# EAGLE board 7seg (EAGLE 6.4)
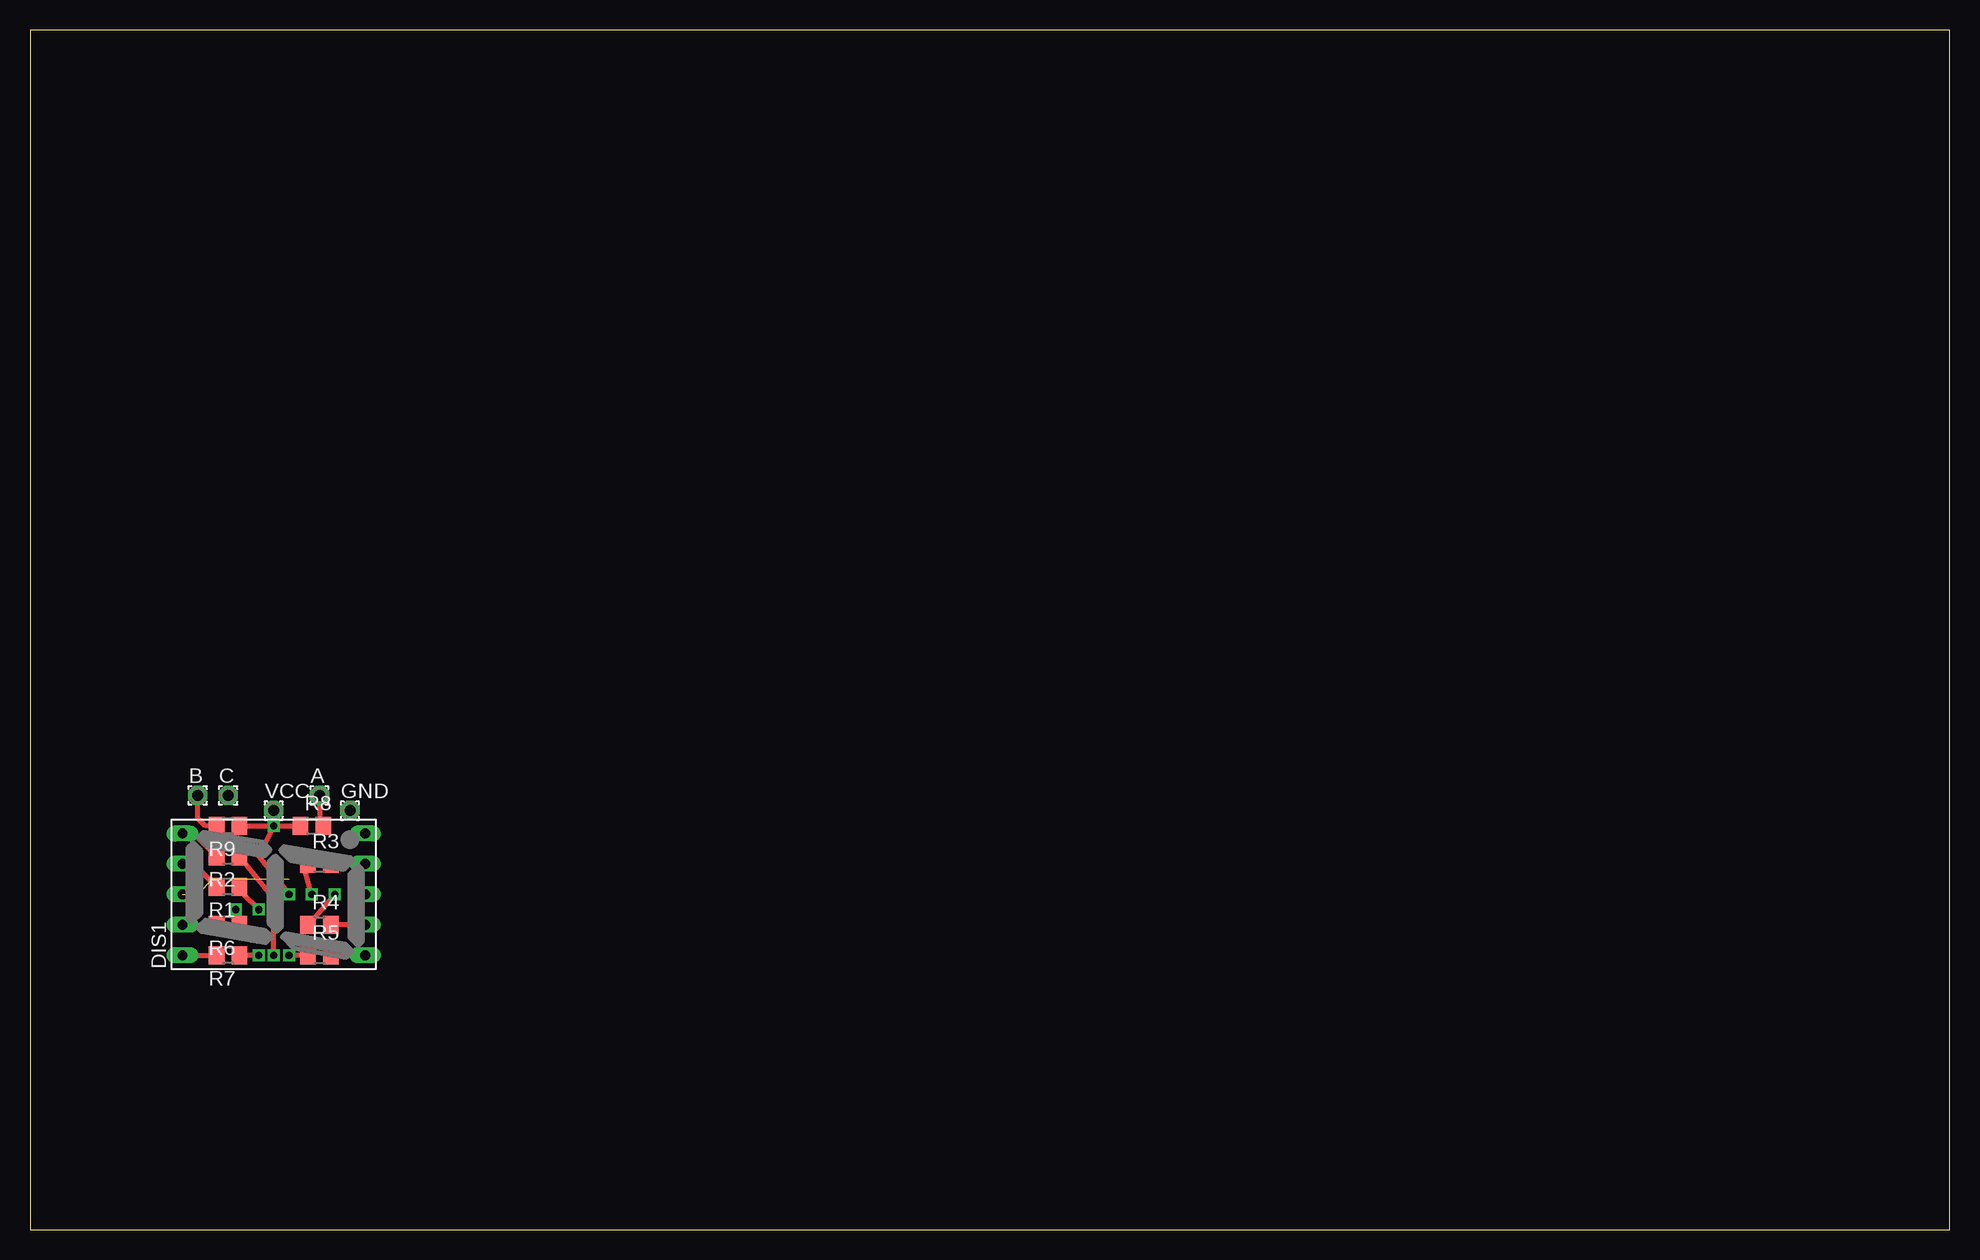
[diagram p0: board, top side]
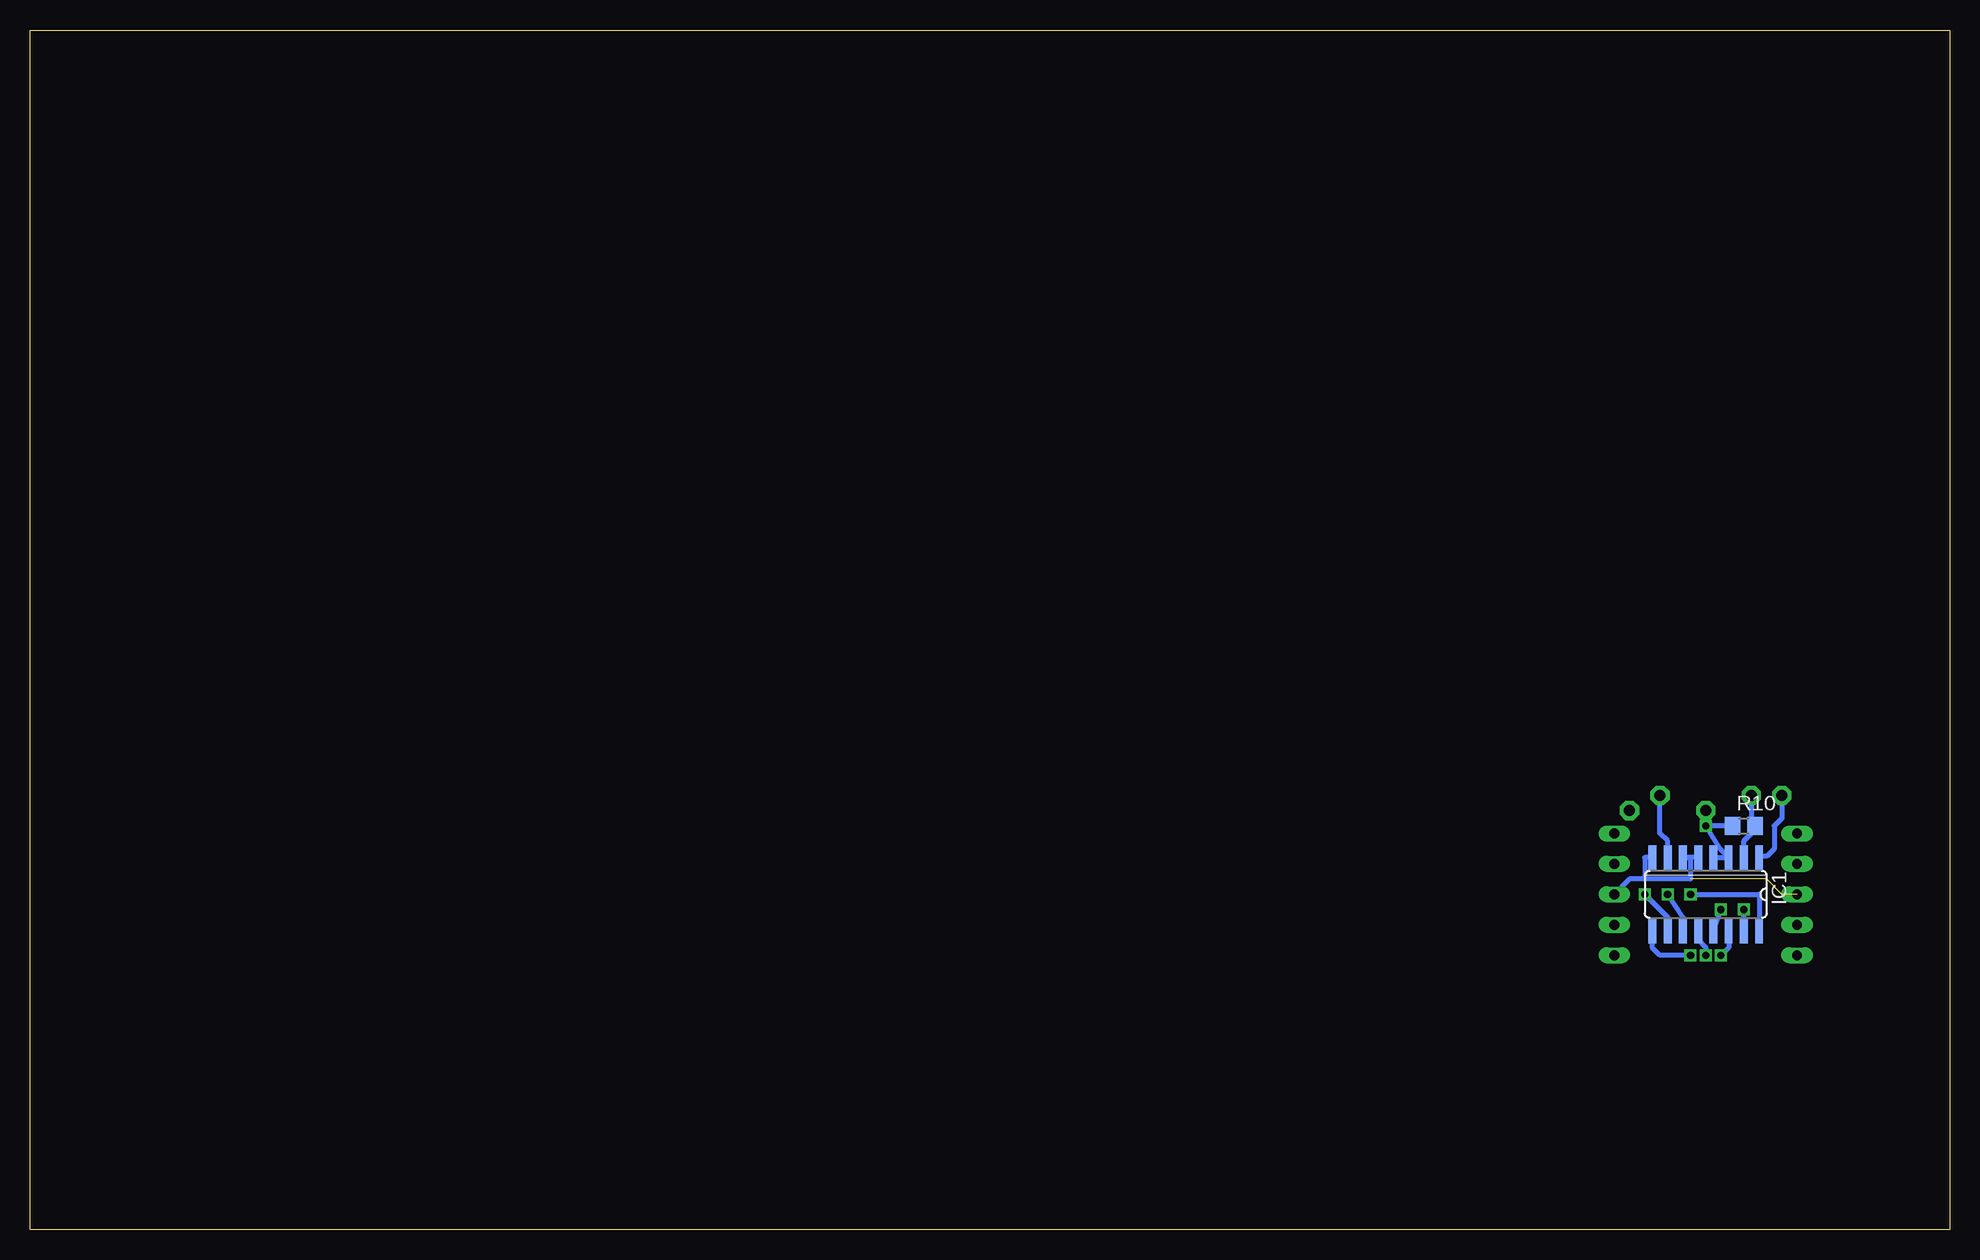
[diagram p1: board, bottom side, seen from below]

Size 160 x 100 mm. Coordinates in mm from the lower left corner, seen from the top.
Outline: 0,0 160,0 160,100 0,100 0,0
Copper layers (1*16): Top 0.035mm / dielectric 1.5mm / Bottom 0.035mm
Design rules "default": minimum track width 10mil, minimum drill 24mil, track to track 8mil, track to pad 8mil, pad to pad 8mil, via to via 8mil, smd to smd 8mil, copper to edge 40mil, drill to drill 8mil, minimum pad ring 10mil, minimum via ring 8mil, stop-mask expansion 4mil, vias tented up to drill 0mil, thermal gap 10mil

## Footprints (pad centres in the part's own frame; a part is rotated, then mirrored left to right if it is on the bottom)
1,6/0,9 = drill 0.914 pad 1.6 octagon: 1 0,0
HDSP-M = drill 0.813 long: 1 -5.08,-7.62; 2 -2.54,-7.62; 3 0,-7.62; 4 2.54,-7.62; 5 5.08,-7.62; 6 5.08,7.62; 7 2.54,7.62; 8 0,7.62; 9 -2.54,7.62; 10 -5.08,7.62
SO16 = smd 0.66 x 2.032: 1 -4.445,-3.073; 2 -3.175,-3.073; 3 -1.905,-3.073; 4 -0.635,-3.073; 5 0.635,-3.073; 6 1.905,-3.073; 7 3.175,-3.073; 8 4.445,-3.073; 9 4.445,3.073; 10 3.175,3.073; 11 1.905,3.073; 12 0.635,3.073; 13 -0.635,3.073; 14 -1.905,3.073; 15 -3.175,3.073; 16 -4.445,3.073
R0805 = smd 1.3 x 1.5: 1 -0.95,0; 2 0.95,0

## Placement (x,y rotation side)
A  [1,6/0,9]  24.13,36.2 0 top
B  [1,6/0,9]  13.97,36.2 0 top
C  [1,6/0,9]  16.51,36.2 0 top
DIS1  HD-H103  [HDSP-M]  20.32,27.94 90 top
GND  [1,6/0,9]  26.67,34.92 0 top
IC1  4511D  [SO16]  20.32,27.94 180 bottom
R1  1k  [R0805]  16.51,28.57 180 top
R2  1k  [R0805]  16.51,31.11 180 top
R3  1k  [R0805]  24.13,30.48 0 top
R4  1k  [R0805]  24.13,25.4 0 top
R5  1k  [R0805]  24.13,22.86 0 top
R6  1k  [R0805]  16.51,25.4 180 top
R7  1k  [R0805]  16.51,22.86 180 top
R8  100k  [R0805]  23.5,33.66 0 top
R9  100k  [R0805]  16.51,33.66 180 top
R10  100k  [R0805]  17.14,33.66 0 bottom
VCC  [1,6/0,9]  20.32,34.92 0 top

## Library data of the parts
A B C GND VCC = wirepad
DIS1 = display-hp; OC_FARNELL: unknown; OC_NEWARK: unknown
IC1 = 45xx
R1-R10 = rcl

## Nets
GND: DIS1.3 DIS1.8 IC1.5 IC1.6 IC1.8
N$1: IC1.13 R1.1
N$2: DIS1.7 R1.2
N$3: IC1.12 R2.1
N$4: DIS1.6 R2.2
N$5: IC1.11 R3.1
N$6: DIS1.4 R3.2
N$7: IC1.10 R4.1
N$8: DIS1.2 R4.2
N$9: IC1.9 R5.1
N$10: DIS1.1 R5.2
N$11: IC1.15 R6.1
N$12: DIS1.9 R6.2
N$13: IC1.14 R7.1
N$14: DIS1.10 R7.2
N$15: A.1 IC1.7 R8.2
N$16: B.1 IC1.1 R9.2
N$17: C.1 IC1.2 R10.2
N$18: GND.1
N$19: VCC.1
VCC: IC1.3 IC1.4 IC1.16 R8.1 R9.1 R10.1

## Tracks (layer width: path | path; a pad name or v marks a point on that pad's centre or on a via)
GND  (3 unrouted)
  Bottom 0.406: 25.4,29.21 21.59,29.21 21.59,31.01 IC1.6 IC1.5 | 25.4,29.21 26.67,29.21 DIS1.3 | IC1.8 25.4,31.01 25.4,29.21
N$1  (via drill 0.6)
  Top 0.406: v19.05,26.67 17.78,27.94 R1.1
  Bottom 0.406: IC1.13 v19.05,26.67
N$2
  Top 0.406: DIS1.7 13.65,30.48 R1.2
N$3  (via drill 0.6)
  Top 0.406: v20.32,22.86 20.32,27.62 R2.1
  Bottom 0.406: IC1.12 20.95,24.13 20.32,23.5 v20.32,22.86
N$4
  Top 0.406: DIS1.6 13.65,33.02 R2.2
N$5  (via drill 0.6)
  Top 0.406: v23.5,27.94 22.86,30.16 R3.1
  Bottom 0.406: IC1.11 22.23,26.04 v23.5,27.94
N$6
  Top 0.406: DIS1.4 R3.2
N$7  (via drill 0.6)
  Top 0.406: v25.4,27.94 R4.1
  Bottom 0.406: IC1.10 23.5,26.04 v25.4,27.94
N$8
  Top 0.406: DIS1.2 R4.2
N$9  (via drill 0.6)
  Top 0.406: R5.1 v21.59,22.86
  Bottom 0.406: v21.59,22.86 24.13,22.86 24.77,23.5 IC1.9
N$10
  Top 0.406: R5.2 DIS1.1
N$11  (via drill 0.6)
  Top 0.406: v17.14,26.67 17.14,25.71 R6.1
  Bottom 0.406: IC1.15 v17.14,26.67
N$12
  Top 0.406: DIS1.9 R6.2
N$13  (via drill 0.6)
  Top 0.406: v19.05,22.86 R7.1
  Bottom 0.406: IC1.14 18.41,23.5 v19.05,22.86
N$14
  Top 0.406: DIS1.10 R7.2
N$15
  Top 0.406: A.1 24.13,33.97 R8.2
  Bottom 0.406: IC1.7 23.5,32.38 24.13,33.02 A.1
N$16
  Top 0.406: R9.2 14.61,33.66 13.97,34.29 B.1
  Bottom 0.406: B.1 13.97,34.29 14.61,33.66 14.61,31.75 15.24,31.11 15.77,31.11 IC1.1
N$17
  Bottom 0.406: IC1.2 17.14,32.38 16.51,33.02 16.51,33.34 R10.2 16.51,33.97 C.1
VCC  (via drill 0.6 pad 1.02)
  Top 0.406: v20.32,33.66 19.05,31.11 v21.59,27.94 | v20.32,33.66 R8.1 | R9.1 v20.32,33.66
  Bottom 0.406: IC1.4 IC1.3 19.05,31.65 v20.32,33.66 R10.1 | v21.59,27.94 15.88,27.94 IC1.16